# Altium PCB 主控板0415 .PcbDoc (part 1 of 3)
Units mil, origin at the board's own origin, x right, y up, seen from the top; angles counter-clockwise.
Board outline 9048 x 3931 mil, 2 copper layers (Top Layer, Bottom Layer); 421 components, 239 nets, 1182 pads, 360 vias.
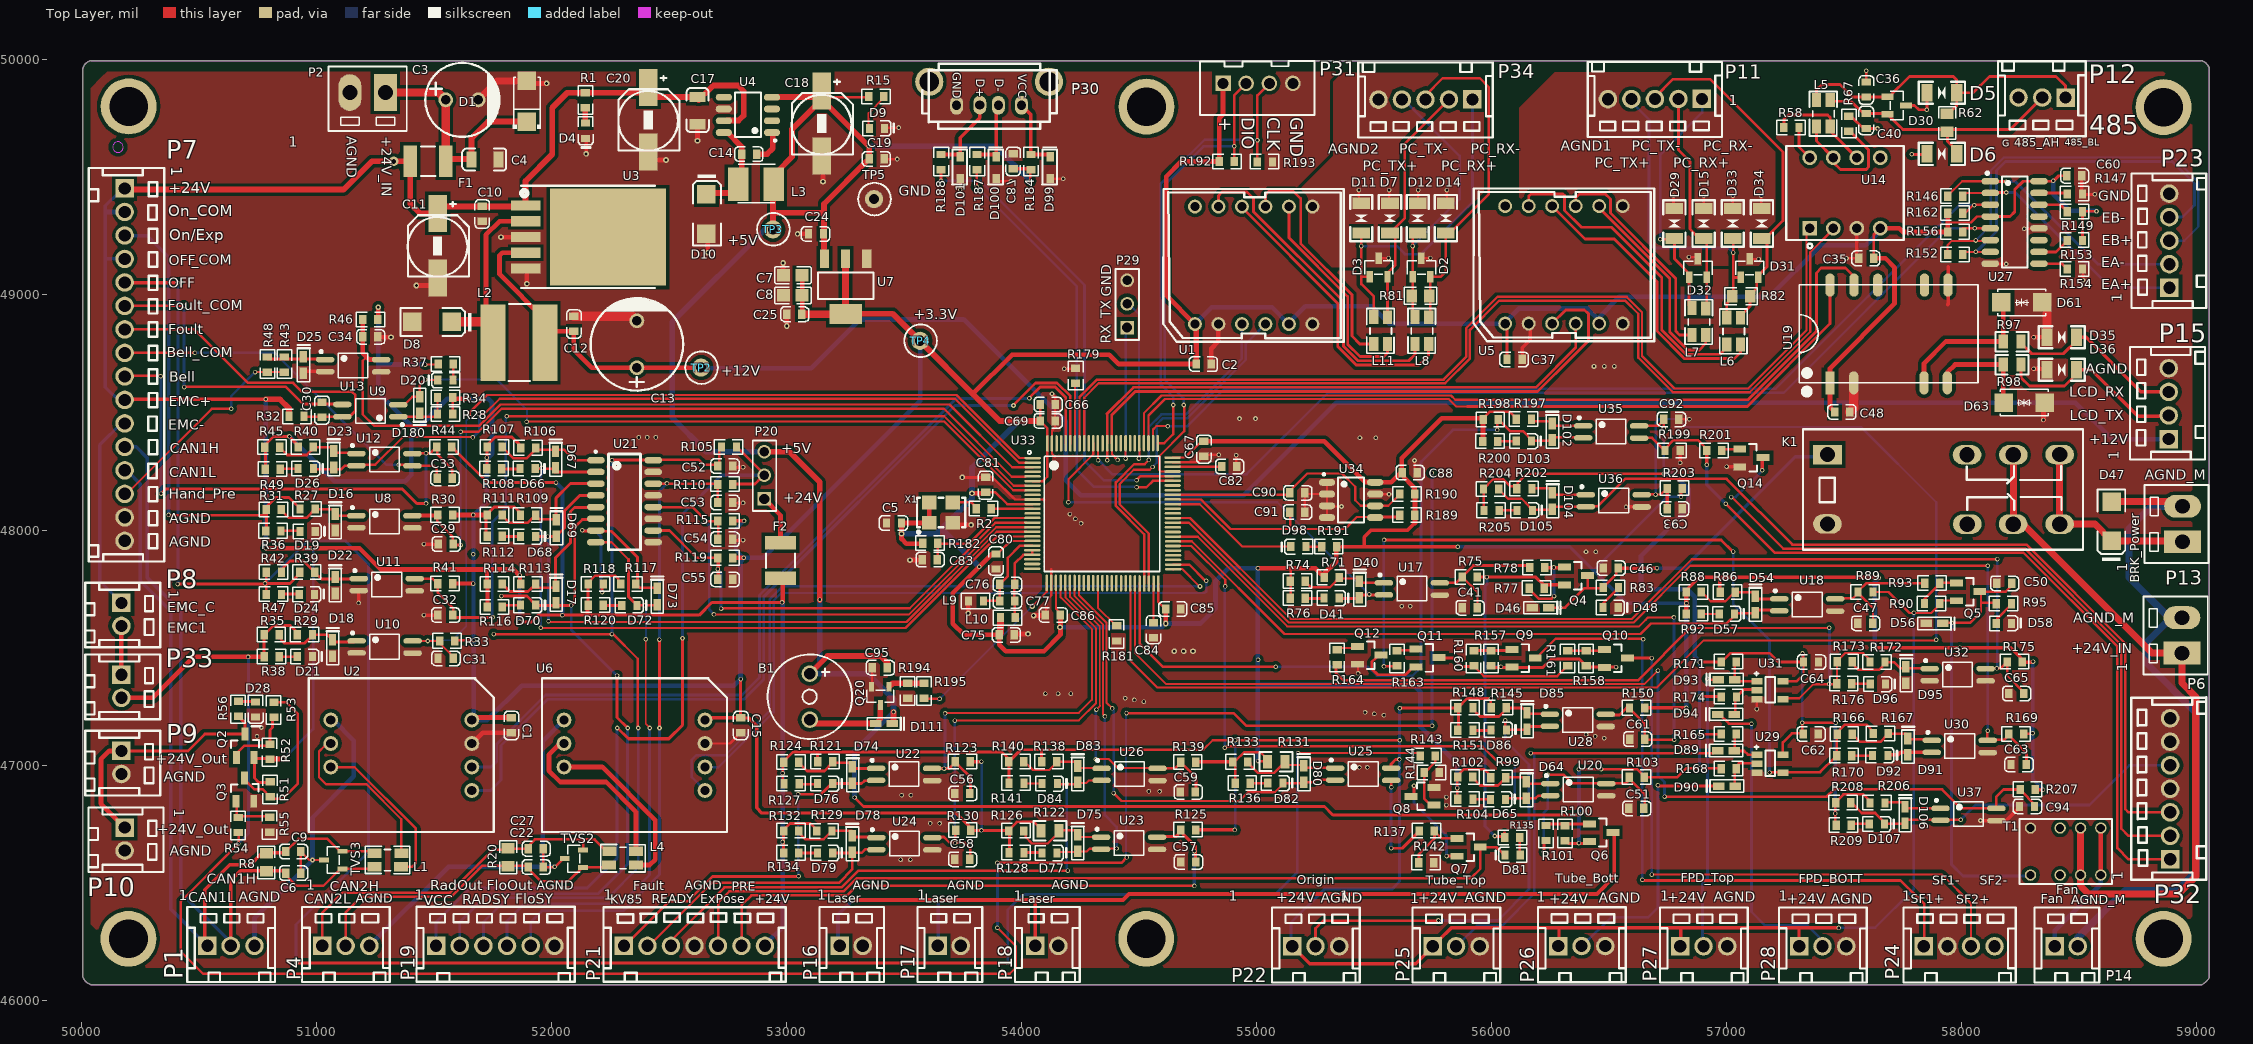
[diagram p0: Top Layer view]
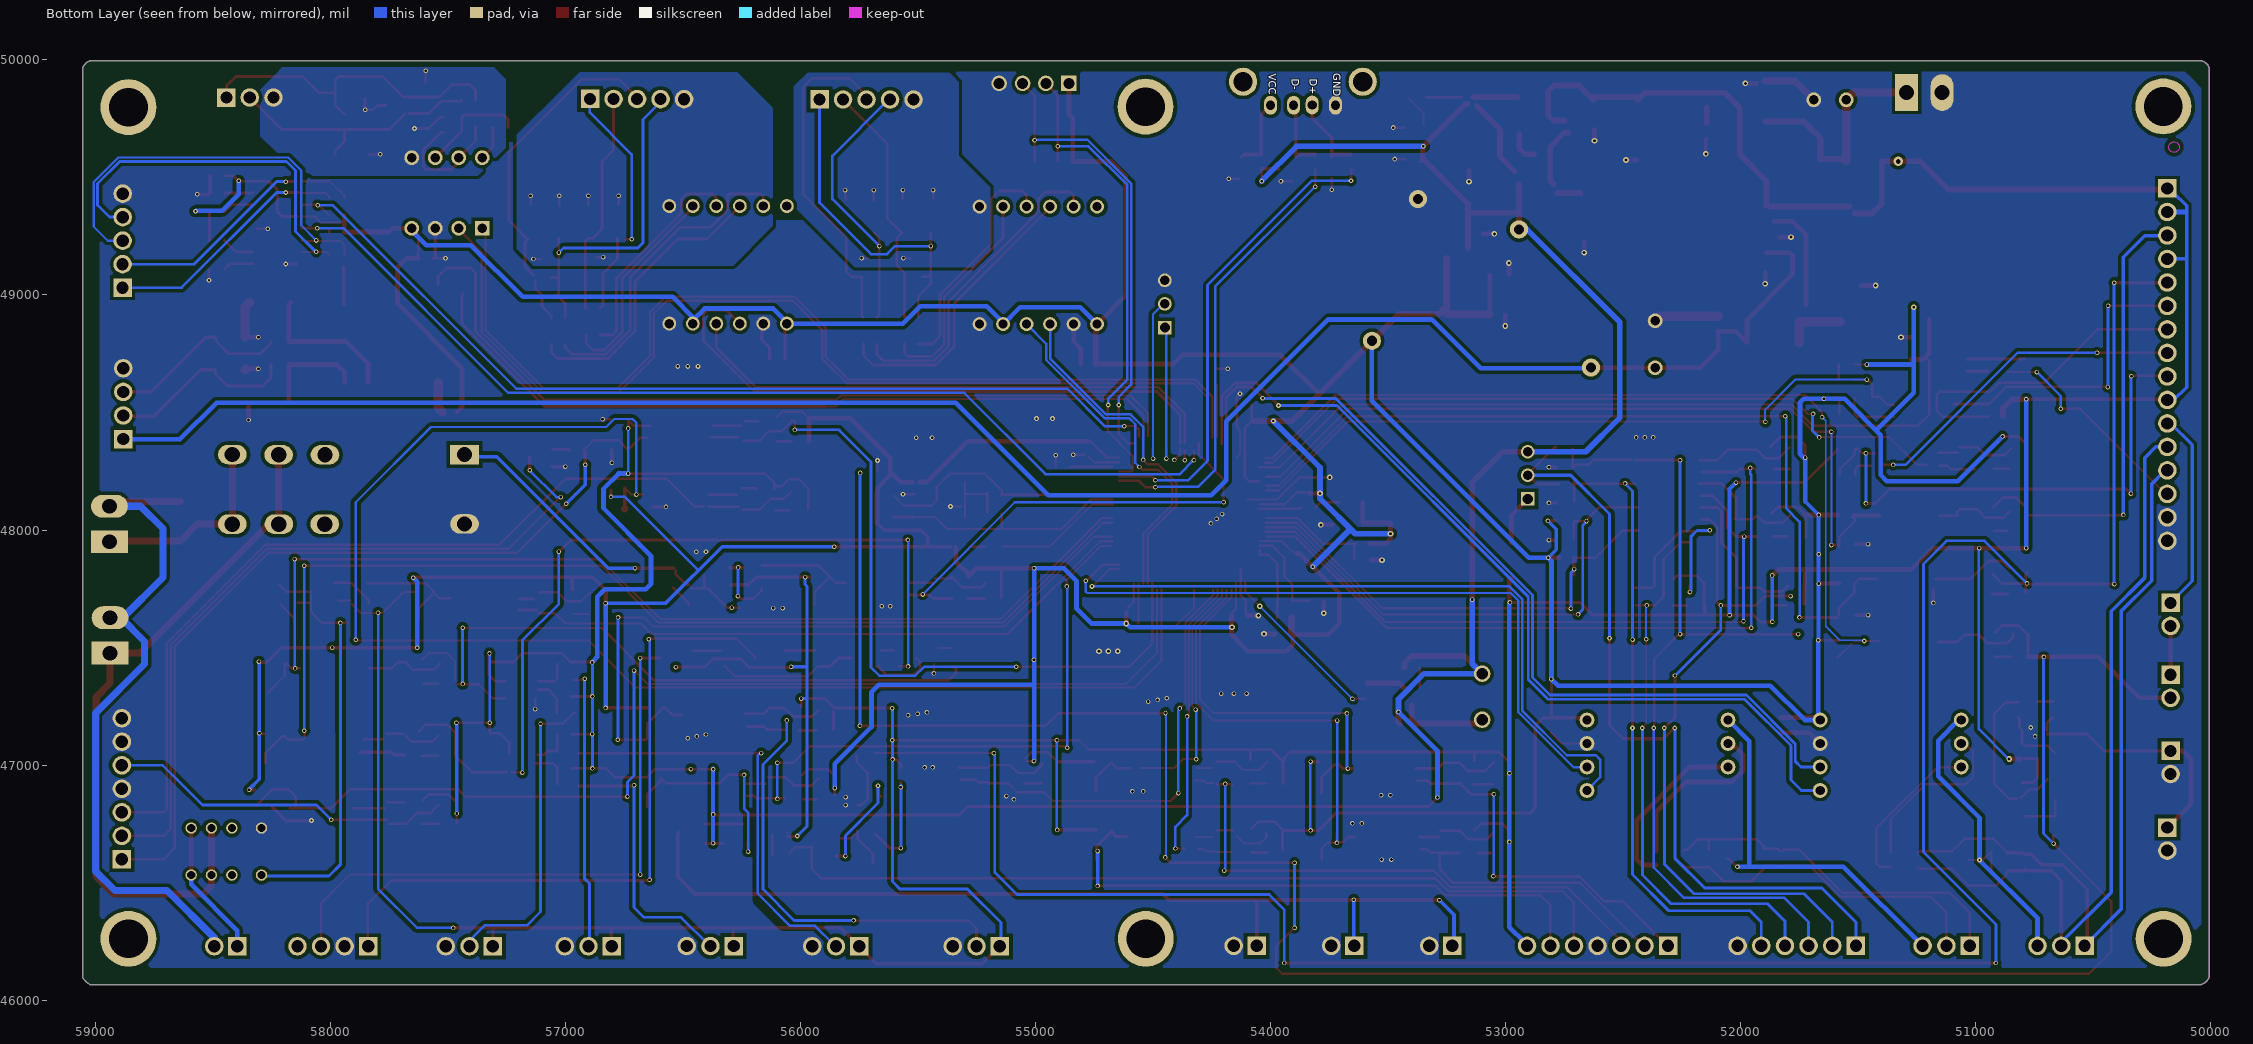
[diagram p1: Bottom Layer view, seen from below]

## Layer stack, top to bottom
Top Layer: signal copper 1.4
Dielectric: dielectric 12.6, FR-4, Dk 4.8
Bottom Layer: signal copper 1.4

## Board outline
50006,46099 50006,49960 cw(c50051.59,49952.23) 50040,49997 59020,49997 cw(c59006.72,49949.3) 59054,49964 59054,46097 cw(c58992.65,46128.31) 59022,46066 50041,46066 cw(c50058.69,46119.82)

## Design rules (kind name [scope] priority, off if disabled: settings)
Clearance Clearance_1 [inpoly] p1: gap=15
Clearance [All] p2: gap=6
MinimumSolderMaskSliver [All] p1: minsoldermaskwidth=0.5
PolygonConnect PolygonConnect_1 [All] p1: connectstyle=Direct reliefconductorwidth=10 reliefentries=4 polygonreliefangle="45 Angle"
PolygonConnect [InNet('No Net') vs InNet('GND')] p2: connectstyle=Direct reliefconductorwidth=10 reliefentries=4 polygonreliefangle="45 Angle"
RoutingVias [All] p1: holewidth=28 width=50 viastyle="Through Hole" minholewidth=28 minwidth=50 maxholewidth=28 maxwidth=50
SilkToSilkClearance [All] p1: silktosilkclearance=0
SilkscreenOverComponentPads SilkToSolderMaskClearance [IsPad] p1: minsilkscreentomaskgap=0
SolderMaskExpansion [All] p1: expansion=4
TestPointUsage FabricationTestPointUsage [All] p1: valid=0 allowmultiple=FALSE
Testpoint FabricationTestpoint [(IsPad And (OnTopLayer Or OnBottomLayer))] p1: side=3 testpointundercomponent=TRUE minsize=40 maxsize=100 preferedsize=60 minholesize=0 maxholesize=40 preferedholesize=32 testpointgrid=1 style=297 order=0123456789
Width [All] p1: maxlimit=190 minlimit=6 preferedwidth=10
21 further rules are at their usual default settings.

## Components (designator, comment, footprint, x,y, rotation, side; value= is the part's Value field where it differs from the comment)
B1 "" CPA5 53102,47392 r90 top
C1 "100NF" C0603 51830,47196 r90 top
C2 "100NF" C0603 54802,48706 r0 top
C3 "330uF" CAP-TH_BD8.0-P3.50-D0.5-FD 51620,49830 r0 top
C4 "100NF" C1206#1 51654,49572 r270 top
C5 "100NF" C0603 53484,48030 r0 top
C6 "30pF" C0603 50876,46540 r180 top
C7 "22uf/25v" C0805 53028,49084 r0 top
C8 "22uf/25v" C0805 53028,48998 r0 top
C9 "30pF" C0603 50876,46632 r180 top
C10 "100NF" C0603 51706,49372 r90 top
C11 "100UF/35V" CAP10 51510,49374 r270 top
C12 "1uf/25v" C0603 52096,48904 r90 top
C13 "1000uF" CAP-TH_BD10.0-P5.00-D1.0-FD 52364,48790 r90 top
C14 "0.1uF" C0603 52868,49599 r0 top
C15 "100NF" C0603 52806,47196 r90 top
C17 "100NF" C1206#2 52618,49848 r0 top
C18 "100uF/35V" CAP10 53144,49894 r270 top
C19 "100NF" C0603 53411,49579 r0 top
C20 "100uF/35V" CAP10 52406,49910 r270 top
C22 "30pF" C0603 51908,46566 r180 top
C24 "100NF" C0603 53152,49260 r0 top
C25 "1uf/25v" C0603 53008,48918 r180 top
C27 "30pF" C0603 51908,46644 r180 top
C29 "100NF" C0603 51525,47940 r180 top
C30 "100NF" C0603 51024,48538 r90 top
C31 "100NF" C0603 51524,47454 r180 top
C32 "100NF" C0603 51523,47638 r180 top
C33 "100NF" C0603 51520,48220 r180 top
C34 "100NF" C0603 51204,48822 r180 top
C35 "100NF" C0603 57620,49156 r0 top
C36 "100pF" C0603 57594,49900 r90 top
C37 "100NF" C0603 56124,48726 r0 top
C40 "100pF" C0603 57594,49714 r270 top
C41 "100NF" C0603 55881,47669 r180 top
C46 "100NF" C0603 56481,47838 r180 top
C47 "NC" C0603 57564,47603 r180 top
C48 "1uF" C0603 57518,48502 r0 top
C50 "100NF" C0603 58155,47773 r180 top
C51 "100NF" C0603 56590,46816 r180 top
C52 "100NF" C0603 52766.68,48272 r0 top
C53 "100NF" C0603 52766.68,48117 r0 top
C54 "100NF" C0603 52766.68,47961 r0 top
C55 "100NF" C0603 52766.68,47790 r0 top
C56 "100NF" C0603 53723,46879 r180 top
C57 "100NF" C0603 54683,46588 r180 top
C58 "100NF" C0603 53722,46599 r180 top
C59 "100NF" C0603 54682,46885 r180 top
C60 "100NF" C0603 58453,49507 r180 top
C61 "100NF" C0603 56594,47110 r180 top
C62 "100NF" C0603 57332,47132 r180 top
C63 "100NF" C0603 58216,47002 r180 top
C64 "100NF" C0603 57333,47438 r180 top
C65 "100NF" C0603 58206,47304 r180 top
C66 "10uF/16V" C0603 54086,48534 r180 top
C67 "100NF" C0603 54776,48372 r90 top
C69 "10uF/16V" C0603 54086,48464 r180 top
C75 "100NF" C0603 53964,47554 r0 top
C76 "1uF" C0603 53913,47769 r180 top
C77 "1uF" C0603 53913,47698 r180 top
C80 "100NF" C0603 53892,47840 r270 top
C81 "100NF" C0603 53848,48218 r90 top
C82 "2uF" C0603 54858,48270 r180 top
C83 "100NF" C0603 53584,47874 r180 top
C84 "2uF" C0603 54562,47548 r270 top
C85 "100NF" C0603 54672,47664 r0 top
C86 "100NF" C0603 54108,47638 r180 top
C87 "100NF" C0603 53965,49595.5 r90 top
C88 "100NF" C0603 55626,48244 r180 top
C90 "49pF" C0603 55148,48158 r180 top
C91 "49pF" C0603 55147,48076 r180 top
C92 "100NF" C0603 56738,48471 r180 top
C93 "100NF" C0603 56806,48090 r0 top
C94 "100NF" C0603 58252,46824 r180 top
C95 "100NF" C0603 53372,47414 r180 top
D1 "SS34" SMA_L4.3-W2.6-LS5.2-RD 51896,49824 r90 top
D2 "TPSM712" SOT-23-3_L2.9-W1.3-P1.90-LS2.4-BR 55702,49116 r270 top
D3 "TPSM712" SOT-23-3_L2.9-W1.3-P1.90-LS2.4-BR 55520,49116 r270 top
D4 "GREEN" LED0603#1 52146,49666 r270 top
D5 "SMB90XM" DIO-DT-SMD_L3.2-W1.6 57916,49860 r180 top
D6 "SMB90XM" DIO-DT-SMD_L3.2-W1.6 57916,49600 r180 top
D7 "SMB90XM" DIO-DT-SMD_L3.2-W1.6 55568,49326.99 r90 top
D8 "SS34" SMA#1 51574,48902 r180 top
D9 "GREEN" LED0603#1 53418,49709 r0 top
D10 "SS34" SMA#1 52644,49426 r270 top
D11 "SMB90XM" DIO-DT-SMD_L3.2-W1.6 55446,49326.99 r90 top
D12 "SMB90XM" DIO-DT-SMD_L3.2-W1.6 55686,49326.99 r90 top
D14 "SMB90XM" DIO-DT-SMD_L3.2-W1.6 55806,49326.99 r90 top
D15 "SMB90XM" DIO-DT-SMD_L3.2-W1.6 56902,49304 r90 top
D16 "1N4148WS" D123-1#1 51083,48065 r0 top
D17 "1N4148WS" D123-1#1 52023,47758 r0 top
D18 "1N4148WS" D123-1#1 51072,47530 r0 top
D19 "GREEN" LED0603#1 50996,47994 r0 top
D20 "GREEN" LED0603#2 51517,48638 r0 top
D21 "GREEN" LED0603#1 50984,47461 r0 top
D22 "1N4148WS" D123-1#1 51083,47797 r0 top
D23 "1N4148WS" D123-1#1 51077,48333 r0 top
D24 "GREEN" LED0603#1 50993,47726 r0 top
D25 "1N4148WS" D123-1#2 50948,48734 r180 top
D26 "GREEN" LED0603#1 50988,48261 r0 top
D28 "LED" LED0603#1 50742,47204 r270 top
D29 "SMB90XM" DIO-DT-SMD_L3.2-W1.6 56778,49304 r90 top
D30 "TPSM712" SOT-23-3_L2.9-W1.3-P1.90-LS2.4-BR 57724,49806 r180 top
D31 "TPSM712" SOT-23-3_L2.9-W1.3-P1.90-LS2.4-BR 57098,49114 r270 top
D32 "TPSM712" SOT-23-3_L2.9-W1.3-P1.90-LS2.4-BR 56878,49114 r270 top
D33 "SMB90XM" DIO-DT-SMD_L3.2-W1.6 57026,49304 r90 top
D34 "SMB90XM" DIO-DT-SMD_L3.2-W1.6 57150,49304 r90 top
D35 "SMB90XM" DIO-DT-SMD_L3.2-W1.6 58426,48820 r0 top
D36 "SMB90XM" DIO-DT-SMD_L3.2-W1.6 58426,48682 r0 top
D40 "M7" D123-1#1 55441,47779 r0 top
D41 "LED" LED0603#1 55352,47710 r0 top
D46 "M7" D123-1#1 56241,47667 r270 top
D47 "M7" SMA#2 58654,47956 r270 top
D48 "LED" LED0603#1 56539,47670 r0 top
D54 "M7" D123-1#1 57125,47715 r0 top
D56 "M7" D123-1#1 57916,47600 r270 top
D57 "LED" LED0603#1 57034,47643 r0 top
D58 "LED" LED0603#1 58212,47603 r0 top
D61 "SMAJ15CA" SMA_L4.3-W2.6-LS5.0-BI 58256,48968 r180 top
D63 "SMAJ15CA" SMA_L4.3-W2.6-LS5.0-BI 58266,48542 r180 top
D64 "M7" D123-1#1 56151,46926 r0 top
D65 "LED" LED0603#1 56060,46854 r0 top
D66 "GREEN" LED0603#1 51932,48261 r0 top
D67 "1N4148WS" D123-1#1 52021,48332 r0 top
D68 "GREEN" LED0603#1 51934,47972 r0 top
D69 "1N4148WS" D123-1#1 52024,48041 r0 top
D70 "GREEN" LED0603#1 51934,47680 r0 top
D72 "GREEN" LED0603#1 52365,47679 r0 top
D73 "1N4148WS" D123-1#1 52453,47749 r0 top
D74 "1N4148WS" D123-1#1 53284,46990 r0 top
D75 "1N4148WS" D123-1#1 54242,46700 r0 top
D76 "LED" LED0603#1 53197,46921 r0 top
D77 "GREEN" LED0603#1 54152,46626 r0 top
D78 "1N4148WS" D123-1#1 53283,46697 r0 top
D79 "LED" LED0603#1 53197,46626 r0 top
D80 "1N4148WS" D123-1#1 55204,46994 r0 top
D81 "LED" LED0603#1 56057,46618 r180 top
D82 "LED" LED0603#1 55113,46923 r0 top
D83 "1N4148WS" D123-1#1 54242,46993 r0 top
D84 "LED" LED0603#1 54153,46921 r0 top
D85 "1N4148WS" D123-1#1 56154,47220 r0 top
D86 "GREEN" LED0603#1 56063,47150 r0 top
D89 "M7" D123-1#1 56966,47064 r90 top
D90 "M7" D123-1#1 56969,46913 r90 top
D91 "M7" D123-1#1 57774,47110 r0 top
D92 "GREEN" LED0603#1 57686,47041 r0 top
D93 "M7" D123-1#1 56967,47366 r90 top
D94 "M7" D123-1#1 56966,47218 r90 top
D95 "M7" D123-1#1 57766,47415 r0 top
D96 "GREEN" LED0603#1 57676,47344 r0 top
D98 "GREEN" LED0603#1 55146,47929 r180 top
D99 "BV05C-MS" D123 54122,49588 r180 top
D100 "BV05C-MS" D123 53892.5,49588 r180 top
D101 "BV05C-MS" D123 53739.5,49588 r180 top
D102 "M7" D123-1#1 56261,48450 r0 top
D103 "LED" LED0603#1 56170,48378 r0 top
D104 "M7" D123-1#1 56262,48156 r0 top
D105 "LED" LED0603#1 56174,48084 r0 top
D106 "M7" D123-1#1 57762,46820 r0 top
D107 "LED" LED0603#1 57672,46749 r0 top
D111 "1N4148WS" D123-1#1 53448,47174 r270 top
D180 "1N4148WS" D123-1#2 51438,48500 r0 top
F1 "Fuse 2" D2120#1 51408,49542 r180 top
F2 "Fuse 2" D2120#2 52948,47938 r270 top
K1 "G2R-2-DC5" K1 57436,48312 r0 top locked
L1 "ACT45B-510-2P-TL003" L1206-6 51258,46572 r90 top
L2 "100UH" L-C54 51766,48782 r0 top
L3 "47UH" LC 52808,49462 r270 top
L4 "ACT45B-510-2P-TL003" L1206-6 52350,46628 r270 top
L5 "ACT45B-510-2P-TL003" L1206-6 57436,49726 r180 top
L6 "ACT45B-510-2P-TL003" L1206-6 57054,48800 r180 top
L7 "ACT45B-510-2P-TL003" L1206-6 56906,48840 r180 top
L8 "ACT45B-510-2P-TL003" L1206-6 55727.41,48802 r180 top
L9 "#NAME?" L0603 53780,47700 r90 top
L10 "#NAME?" L0603 53916,47628 r90 top
L11 "ACT45B-510-2P-TL003" L1206-6 55552,48802 r180 top
P1 "Header 3" 254-3P 50537,46231 r0 top locked
P2 "Header 2" JPP1 51294,49886 r180 top
P4 "Header 3" 254-3P 51026,46231 r0 top locked
P6 "Header 2" JPP1 58962,47476 r90 top locked
P7 "Header 16" 254-16P 50191,49435 r0 top locked
P8 "Header 2" 254-2P 50174,47684 r270 top
P9 "Header 2" 254-2P 50174,47054 r270 top
P10 "Header 2" 254-2P 50188,46728 r270 top locked
P11 "Header 5" 254-5P 56900,49836 r90 top locked
P12 "Header 3" 254-3P 58442,49840 r180 top
P13 "Header 2" JPP1 58965,47950 r90 top
P14 "Header 2" 254-2P 58402,46232 r0 top
P15 "Header 4" 254-4P 58897,48388 r90 top locked
P16 "Header 2" 254-2P 53233,46234 r0 top
P17 "Header 2" 254-2P 53650,46234 r0 top
P18 "Header 2" 254-2P 54065,46234 r0 top
P19 "Header 6" 254-6P 51515,46218 r0 top locked
P20 "Header 3" 2.54-3P 52916,48139 r180 top locked
P21 "Header 7" 254-7P 52322,46228 r0 top locked
P22 "Header 3" 254-3P 55152,46229 r0 top
P23 "Header 5" 254-5P 58886,49026 r0 top locked
P24 "Header 4H" 254-4P 57840,46213 r0 top
P25 "Header 3" 254-3P 55750,46229 r0 top
P26 "Header 3" 254-3P 56284,46230 r0 top
P27 "Header 3" 254-3P 56803,46229 r0 top
P28 "Header 3" 254-3P 57309,46229 r0 top
P29 "Header 3" 2.54-3P 54460,48868 r180 top
P30 "Header 4" USB-A 53720,49805 r0 top locked
P31 "Header 4" JP2 54848,49906 r180 top locked
P32 "Header 7" 254-7P 58890,46612 r90 top locked
P33 "Header 2" 254-2P 50174,47378 r270 top
P34 "Header 5" 254-5P 55924,49834 r90 top locked
Q2 "AO3401A" SOT32-5 50730,47041 r270 top
Q3 "Y1" SOT32-5 50729,46854 r270 top
Q4 "S8550" SOT32-5 56318,47772 r180 top
Q5 "S8550" SOT32-5 57986,47704 r180 top
Q6 "AO3401A" SOT32-5 56425,46680 r180 top
Q7 "Y1" SOT32-5 55861,46617 r180 top
Q8 "Y1" SOT32-5 55748,46900 r0 top
Q9 "S8550" SOT32-5 56095,47422 r180 top
Q10 "S8550" SOT32-5 56488,47421 r180 top
Q11 "Y1" SOT32-5 55686,47423 r180 top
Q12 "Y1" SOT32-5 55438,47434 r180 top
Q14 "Y1" SOT32-5 57064,48274 r180 top
Q20 "S8050" SOT-23-3_L2.9-W1.3-P1.90-LS2.3-BR 53400,47294 r90 top
R1 "30kΩ" R0603#1 52144,49796 r270 top
R2 "10R" R0603#1 53872,48090 r0 top
R8 "120Ω" R0805#1 50788,46586 r90 top
R15 "10kΩ" R0603#1 53415,49844 r0 top
R20 "120Ω" R0805#1 51816,46608 r270 top
R27 "10kΩ" R0603#1 50995,48089 r0 top
R28 "330Ω" R0603#2 51516,48494 r0 top
R29 "10kΩ" R0603#1 50984,47554 r0 top
R30 "5.1kΩ" R0603#1 51581,48064 r0 top
R31 "NC" R0603#1 50851,48087 r0 top
R32 "10kΩ" R0603#2 50884,48484 r0 top
R33 "5.1kΩ" R0603#1 51589,47528 r0 top
R34 "NC" R0603#2 51516,48564 r0 top
R35 "NC" R0603#1 50842,47554 r0 top
R36 "30kΩ" R0603#1 50850,47996 r0 top
R37 "5.1kΩ" R0603#2 51583,48706 r180 top
R38 "30kΩ" R0603#1 50843,47461 r0 top
R39 "10kΩ" R0603#1 50993,47820 r0 top
R40 "330Ω" R0603#1 50988,48353 r0 top
R41 "5.1kΩ" R0603#1 51581,47771 r0 top
R42 "NC" R0603#1 50852,47820 r0 top
R43 "10kΩ" R0603#2 50864,48672 r90 top
R44 "10kΩ" R0603#1 51577,48353 r0 top
R45 "NC" R0603#1 50845,48352 r0 top
R46 "5.1kΩ" R0603#2 51198,48896 r0 top
R47 "30kΩ" R0603#1 50852,47726 r0 top
R48 "NC" R0603#2 50792,48672 r90 top
R49 "5.1kΩ" R0603#1 50847,48259 r0 top
R51 "10kΩ" R0603#1 50804,46929 r90 top
R52 "10kΩ" R0603#1 50803,47088 r90 top
R53 "20kΩ" R0603#1 50820,47268 r90 top
R54 "10kΩ" R0603#1 50668,46777 r90 top
R55 "20kΩ" R0603#1 50802,46778 r90 top
R56 "30kΩ" R0603#1 50669,47271 r90 top
R58 "5.1kΩ" R0603#1 57308,49712 r0 top
R62 "120Ω" R0805#1 57938,49732 r270 top
R67 "5.1kΩ" R0603#1 57520,49696 r270 top
R71 "330Ω" R0603#1 55352,47798 r0 top
R74 "15P101R" R0603#1 55208,47782 r0 top
R75 "10kΩ" R0603#1 55940,47800 r0 top
R76 "5.1kΩ" R0603#1 55208,47710 r0 top
R77 "20kΩ" R0603#1 56224,47752 r0 top
R78 "20kΩ" R0603#1 56226,47840 r0 top
R81 "120Ω" R0805#1 55698,48996 r0 top
R82 "120Ω" R0805#1 57062,48994 r180 top
R83 "30kΩ" R0603#1 56540,47755 r0 top
R86 "330Ω" R0603#1 57037,47735 r0 top
R88 "NC" R0603#1 56893,47736 r0 top
R89 "10kΩ" R0603#1 57623,47736 r0 top
R90 "20kΩ" R0603#1 57906,47687 r0 top
R92 "5.1kΩ" R0603#1 56892,47643 r0 top
R93 "10kΩ" R0603#1 57907,47774 r0 top
R95 "30kΩ" R0603#1 58212,47686 r0 top
R97 "12Ω" R0805#2 58252,48802 r180 top
R98 "12Ω" R0805#2 58252,48704 r180 top
R99 "330Ω" R0603#1 56061,46946 r0 top
R100 "10kΩ" R0603#1 56313,46742 r90 top
R101 "10kΩ" R0603#1 56232,46743 r90 top
R102 "NC" R0603#1 55920,46949 r0 top
R103 "10kΩ" R0603#1 56650,46948 r0 top
R104 "5.1kΩ" R0603#1 55921,46855 r0 top
R105 "5.1kΩ" R0603#1 52788,48353 r0 top
R106 "330Ω" R0603#1 51934,48349 r0 top
R107 "NC" R0603#1 51791,48353 r0 top
R108 "5.1kΩ" R0603#1 51790,48261 r0 top
R109 "330Ω" R0603#1 51933,48063 r0 top
R110 "5.1kΩ" R0603#1 52772.68,48194 r0 top
R111 "NC" R0603#1 51792,48064 r0 top
R112 "5.1kΩ" R0603#1 51791,47973 r0 top
R113 "10kΩ" R0603#1 51934,47770 r0 top
R114 "NC" R0603#1 51791,47770 r0 top
R115 "5.1kΩ" R0603#1 52772.68,48038 r0 top
R116 "30kΩ" R0603#1 51791,47672 r0 top
R117 "10kΩ" R0603#1 52360,47770 r0 top
R118 "NC" R0603#1 52221,47770 r0 top
R119 "5.1kΩ" R0603#1 52772.68,47881 r0 top
R120 "30kΩ" R0603#1 52221,47680 r0 top
R121 "10kΩ" R0603#1 53197,47014 r0 top
R122 "330Ω" R0805#2 54084,46720 r0 top
R123 "5.1kΩ" R0603#1 53783,47014 r0 top
R124 "NC" R0603#1 53053,47012 r0 top
R125 "10kΩ" R0603#1 54742,46724 r0 top
R126 "NC" R0603#1 54010,46720 r0 top
R127 "30kΩ" R0603#1 53054,46921 r0 top
R128 "5.1kΩ" R0603#1 54011,46627 r0 top
R129 "10kΩ" R0603#1 53194,46719 r0 top
R130 "5.1kΩ" R0603#1 53784,46723 r0 top
R131 "330Ω" R0805#2 55046,47014 r0 top
R132 "NC" R0603#1 53053,46720 r0 top
R133 "NC" R0603#1 54963,47013 r0 top
R134 "30kΩ" R0603#1 53053,46626 r0 top
R135 "10kΩ" R0603#2 56056,46692 r0 top
R136 "5.1kΩ" R0603#1 54973,46923 r0 top
R137 "20kΩ" R0603#1 55757,46720 r0 top
R138 "10kΩ" R0603#1 54150,47014 r0 top
R139 "5.1kΩ" R0603#1 54741,47012 r0 top
R140 "NC" R0603#1 54010,47014 r0 top
R141 "30kΩ" R0603#1 54011,46923 r0 top
R142 "20kΩ" R0603#1 55755,46584 r0 top
R143 "20kΩ" R0603#1 55760,47039 r0 top
R144 "20kΩ" R0603#1 55778,46968 r0 top
R145 "10kΩ" R0603#1 56063,47244 r0 top
R146 "120Ω" R0603#1 58005,49420 r0 top
R147 "10kΩ" R0603#1 58514,49430 r0 top
R148 "NC" R0603#1 55921,47244 r0 top
R149 "10kΩ" R0603#1 58514,49354 r0 top
R150 "10kΩ" R0603#1 56651,47243 r0 top
R151 "20kΩ" R0603#1 55921,47148 r0 top
R152 "120Ω" R0603#1 58005,49172 r0 top
R153 "10kΩ" R0603#1 58514,49232 r0 top
R154 "10kΩ" R0603#1 58514,49110 r0 top
R156 "10kΩ" R0603#1 58005,49268 r0 top
R157 "20kΩ" R0603#1 55998,47487 r90 top
R158 "20kΩ" R0603#1 56403,47487 r90 top
R160 "20kΩ" R0603#1 55925,47486 r90 top
R161 "20kΩ" R0603#1 56324,47487 r90 top
R162 "10kΩ" R0603#1 58005,49348 r0 top
R163 "20kΩ" R0603#1 55598,47487 r90 top
R164 "20kΩ" R0603#1 55344,47491 r90 top
R165 "20kΩ" R0603#1 57041,47132 r0 top
R166 "510Ω" R0603#1 57534,47131 r0 top
R167 "NC" R0603#1 57688,47134 r0 top
R168 "20kΩ" R0603#1 57041,46984 r0 top
R169 "10kΩ" R0603#1 58264,47132 r0 top
R170 "5.1kΩ" R0603#1 57533,47040 r0 top
R171 "20kΩ" R0603#1 57041,47439 r0 top
R172 "510Ω" R0603#1 57674,47438 r0 top
R173 "NC" R0603#1 57534,47440 r0 top
R174 "20kΩ" R0603#1 57042,47290 r0 top
R175 "10kΩ" R0603#1 58258,47439 r0 top
R176 "5.1kΩ" R0603#1 57532,47346 r0 top
R179 "10kΩ" R0603#1 54230,48624 r270 top
R181 "10kΩ" R0603#1 54406,47592 r90 top
R182 "10kΩ" R0603#1 53644,47944 r0 top
R184 "0Ω" R0603#2 54040.5,49533.5 r90 top
R187 "220Ω" R0603#2 53811,49533.5 r90 top
R188 "220Ω" R0603#2 53658,49533.5 r90 top
R189 "10kΩ" R0603#1 55674,48063 r0 top
R190 "10kΩ" R0603#1 55674,48153 r0 top
R191 "5.1kΩ" R0603#1 55341,47929 r0 top
R192 "10kΩ" R0603#2 54842,49568 r0 top
R193 "10kΩ" R0603#2 55068,49566 r180 top
R194 "10kΩ" R0603#1 53516,47348 r90 top
R195 "1.8kΩ" R0603#1 53586,47348 r90 top
R197 "330Ω" R0603#1 56170,48471 r0 top
R198 "10kΩ" R0603#1 56028,48470 r0 top
R199 "5.1kΩ" R0603#1 56802,48338 r0 top
R200 "5.1kΩ" R0603#1 56027,48377 r0 top
R201 "5.1kΩ" R0603#1 56980,48338 r0 top
R202 "510Ω" R0603#1 56172,48176 r0 top
R203 "5.1kΩ" R0603#1 56811,48177 r0 top
R204 "NC" R0603#1 56030,48174 r0 top
R205 "5.1kΩ" R0603#1 56032,48083 r0 top
R206 "510Ω" R0603#1 57674,46839 r0 top
R207 "5.1kΩ" R0603#1 58313,46896 r0 top
R208 "NC" R0603#1 57529,46840 r0 top
R209 "5.1k" R0603#1 57530,46744 r0 top
T1 "HFD4/24" JP1 58282,46732 r0 top locked
TP2 "RH-5001" TP 52640,48692 r0 top
TP3 "RH-5001" TP 52946,49280 r0 top
TP4 "RH-5001" TP 53572,48806 r0 top
TP5 "RH-5001" TP 53376,49409 r0 top
TVS2 "PESD1CAN" SOT-23-3_L2.9-W1.3-P1.90-LS2.3-BR 52096,46602 r0 top
TVS3 "PESD1CAN" SOT-23-3_L2.9-W1.3-P1.90-LS2.3-BR 51072,46596 r0 top
U1 "RSM3422" DIP-12_L19.5-W16.5-P2.54-LS12.7-BL 54988,49126 r0 top locked
U2 "CTM1051KAT" COMM-TH_CTM1051KAT 51362,47042 r180 top locked
U3 "LM2576HVR-12" TO5 51874,49390 r0 top
U4 "LM2674MX-5.0/NOPB" SOP-8 52943,49694 r180 top
U5 "RSM3422" DIP-12_L19.5-W16.5-P2.54-LS12.7-BL 56308,49128 r0 top locked
U6 "CTM1051KAT" COMM-TH_CTM1051KAT 52354,47042 r180 top
U7 "TLV1117LV33DCYR" TO9 53259,48918 r0 top
U8 "LTV-217-C-G" SOP-4#1 51174,48063 r0 top
U9 "LTV-217-C-G" SOP-4#2 51346,48480 r0 top
U10 "LTV-217-C-G" SOP-4#1 51175,47530 r0 top
U11 "LTV-217-C-G" SOP-4#1 51184,47795 r0 top
U12 "LTV-217-C-G" SOP-4#1 51174,48327 r0 top
U13 "LTV-217-C-G" SOP-4#2 51041,48727 r180 top
U14 "TD301M485" COMM-TH_TD301M485 57504,49434 r0 top
U17 "LTV-217-C-G" SOP-4#1 55545,47777 r0 top
U18 "LTV-217-C-G" SOP-4#1 57227,47709 r0 top
U19 "TD331S232H" U1 57436,48608 r0 top locked
U20 "LTV-217-C-G" SOP-4#1 56253,46923 r0 top
U21 "LTV-247" SOP16-1 52186,48298 r0 top
U22 "LTV-217-C-G" SOP-4#1 53385,46988 r0 top
U23 "LTV-217-C-G" SOP-4#1 54342,46695 r0 top
U24 "LTV-217-C-G" SOP-4#1 53386,46693 r0 top
U25 "LTV-217-C-G" SOP-4#1 55338,46989 r0 top
U26 "LTV-217-C-G" SOP-4#1 54344,46988 r0 top
U27 "AM26LV32IDR" SOP16 58122,49484 r0 top locked
U28 "LTV-217-C-G" SOP-4#1 56251,47218 r0 top
U29 "SN74AHC1G02DBVR" SOT32-6 57122,47036 r0 top
U30 "LTV-217-C-G" SOP-4#1 57876,47107 r0 top
U31 "SN74AHC1G02DBVR" SOT32-6 57122,47349 r0 top
U32 "LTV-217-C-G" SOP-4#1 57867,47412 r0 top
U33 "STM32F407VET6" 100PIN 54053,48304 r45 top locked
U34 "AT24C64D-SSHM-T" SOP-8 55296,48200 r0 top
U35 "LTV-217-C-G" SOP-4#1 56393,48445 r0 top
U36 "LTV-217-C-G" SOP-4#1 56404,48152 r0 top locked
U37 "LTV-217-C-G" SOP-4#1 57913,46818 r0 top
X1 "8MHz" OSC-SMD_4P-L5.0-W3.2-BL_SG5032 53658,48074 r0 top

## Footprints (in the part's own frame and the unit in brackets; to place one, negate y for a bottom-side part, rotate by r counter-clockwise, add the part's x,y. Pads: shape width x height; smd on the part's side, far side on the other; paste and mask are expansions set on the pad)
2.54-3P [mil]
  rect 57.37x57.37 hole 43: 1(10,7)
  round 58.37 hole 41: 2(10,-94) 3(10,-194)
  silkscreen extent -41,-242 59,59
100PIN [mil]
  oval 69.87x10.81 smd rot 135: 1(-2,5) 2(-15.92,-8.79) 3(-29.83,-22.58) 4(-43.75,-36.37) 5(-57.67,-50.17) 6(-71.58,-63.96) 7(-85.5,-77.75) 8(-99.42,-91.54) 9(-113.33,-105.33) 10(-127.25,-119.12) 11(-141.17,-132.92) 12(-155.08,-146.71) 13(-169,-160.5) 14(-182.92,-174.29) 15(-196.83,-188.08) 16(-210.75,-201.87) 17(-224.67,-215.67) 18(-238.58,-229.46) 19(-252.5,-243.25) 20(-266.42,-257.04) 21(-280.33,-270.83) 22(-294.25,-284.62) 23(-308.17,-298.42) 24(-322.08,-312.21) 25(-336,-326) 51(86,-752) 52(99.92,-737.92) 53(113.83,-723.83) 54(127.75,-709.75) 55(141.67,-695.67) 56(155.58,-681.58) 57(169.5,-667.5) 58(183.42,-653.42) 59(197.33,-639.33) 60(211.25,-625.25) 61(225.17,-611.17) 62(239.08,-597.08) 63(253,-583) 64(266.92,-568.92) 65(280.83,-554.83) 66(294.75,-540.75) 67(308.67,-526.67) 68(322.58,-512.58) 69(336.5,-498.5) 70(350.42,-484.42) 71(364.33,-470.33) 72(378.25,-456.25) 73(392.17,-442.17) 74(406.08,-428.08) 75(420,-414)
  oval 69.87x10.81 smd rot 45: 26(-335,-412) 27(-321.13,-426.08) 28(-307.25,-440.17) 29(-293.38,-454.25) 30(-279.5,-468.33) 31(-265.63,-482.42) 32(-251.75,-496.5) 33(-237.88,-510.58) 34(-224,-524.67) 35(-210.13,-538.75) 36(-196.25,-552.83) 37(-182.38,-566.92) 38(-168.5,-581) 39(-154.63,-595.08) 40(-140.75,-609.17) 41(-126.88,-623.25) 42(-113,-637.33) 43(-99.13,-651.42) 44(-85.25,-665.5) 45(-71.38,-679.58) 46(-57.5,-693.67) 47(-43.63,-707.75) 48(-29.75,-721.83) 49(-15.88,-735.92) 50(-2,-750) 76(419,-326) 77(405.12,-312.21) 78(391.25,-298.42) 79(377.37,-284.62) 80(363.5,-270.83) 81(349.62,-257.04) 82(335.75,-243.25) 83(321.87,-229.46) 84(308,-215.67) 85(294.13,-201.88) 86(280.25,-188.08) 87(266.37,-174.29) 88(252.5,-160.5) 89(238.62,-146.71) 90(224.75,-132.92) 91(210.87,-119.13) 92(197,-105.33) 93(183.12,-91.54) 94(169.25,-77.75) 95(155.37,-63.96) 96(141.5,-50.17) 97(127.62,-36.37) 98(113.75,-22.58) 99(99.87,-8.79) 100(86,5)
  silkscreen extent -309,-719 386,39
254-2P [mil]
  rect 78.74x78.74 hole 52: 1(-6,-3)
  round 78.74 hole 52: 2(92,-3)
  silkscreen extent -92,-157 183,162
254-3P [mm]
  rect 2x2 hole 1.321: 1(0,0)
  round 2 hole 1.321: 2(2.515,0) 3(5.08,0)
  silkscreen extent -2.18,-3.91 7.29,4.19
254-4P [mil]
  rect 78.74x78.74 hole 52: 1(-1,16)
  round 78.74 hole 52: 2(99.33,16) 3(199.67,16) 4(300,16)
  silkscreen extent -88,-138 390,181
254-5P [mil]
  rect 78.74x78.74 hole 52: 1(-2,5)
  round 78.74 hole 52: 2(-2.25,105) 3(-2.5,205) 4(-2.75,305) 5(-3,405)
  silkscreen extent -164,-81 155,491
254-6P [mil]
  rect 78.74x78.74 hole 52: 1(-5,13)
  round 78.74 hole 52: 2(95.6,13) 3(196.2,13) 4(296.8,13) 5(397.4,13) 6(498,13)
  silkscreen extent -89,-140 585,179
254-7P [mil]
  rect 78.74x78.74 hole 52: 1(-13,3)
  round 78.74 hole 52: 2(87,3) 3(187,3) 4(287,3) 5(387,3) 6(487,3) 7(587,3)
  silkscreen extent -100,-150 676,168
254-16P [mil]
  rect 78.74x78.74 hole 52: 1(-6,18)
  round 78.74 hole 52: 2(-6,-81.93) 3(-6,-181.87) 4(-6,-281.8) 5(-6,-381.73) 6(-6,-481.67) 7(-6,-581.6) 8(-6,-681.53) 9(-6,-781.47) 10(-6,-881.4) 11(-6,-981.33) 12(-6,-1081.27) 13(-6,-1181.2) 14(-6,-1281.13) 15(-6,-1381.07) 16(-6,-1481)
  silkscreen extent -158,-1569 163,105
C0603 [mm]
  rect 0.8x1 smd: 1(0.152,0) 2(-1.473,0)
  silkscreen extent -2.24,-0.79 0.81,0.79
C0805 [mm]
  rect 1.41x1.35 smd: 1(-1,0) 2(1,0)
  silkscreen extent -1.96,-0.9 1.96,0.9
C1206#1 [mil]
  rect 68.9x43.31 smd: 1(-4,6) 2(-4,122)
  silkscreen extent -52,-33 43,154
C1206#2 [mil]
  rect 68.9x43.31 smd: 1(4,-6) 2(4,-122)
  silkscreen extent -43,-154 52,33
CAP10 [mil]
  rect 157.48x78.74 smd: 1(27,7) 2(302,7)
  silkscreen extent -22,-121 296,140
CAP-TH_BD8.0-P3.50-D0.5-FD [mm]
  round 1.6 hole 1: 1(-1.75,0) 2(1.75,0)
  silkscreen extent -3.96,-4 4.04,4
CAP-TH_BD10.0-P5.00-D1.0-FD [mm]
  round 1.6 hole 1: 1(-2.54,0) 2(2.54,0)
  silkscreen extent -5,-5 5.08,5
COMM-TH_CTM1051KAT [mm]
  round 1.6 hole 1: 1(-7.62,-3.81) 2(-7.62,-1.27) 3(-7.62,1.27) 4(-7.62,3.81) 6(7.62,1.27) 7(7.62,-1.27) 8(7.62,-3.81)
  silkscreen extent -10,-8.3 10,8.3
COMM-TH_TD301M485 [mm]
  rect 1.6x1.6 hole 1: 1(-3.81,-3.81)
  round 1.6 hole 1: 2(-1.27,-3.81) 3(1.27,-3.81) 4(3.81,-3.81) 5(3.81,3.81) 6(1.27,3.81) 7(-1.27,3.81) 8(-3.81,3.81)
  silkscreen extent -6.35,-5.97 6.35,5.08
CPA5 [mil]
  round 70.37 hole 49: 1(-199,2) 2(-3,2)
  silkscreen extent -281,-178 79,182
D123 [mm]
  rect 0.8x1 smd: 1(0,0) 2(0,2.362)
  silkscreen extent -0.74,-1.02 0.86,3
D123-1#1 [mil]
  rect 31.5x49.21 smd: 1(-3,3) 2(-3,-67)
  silkscreen extent -28,-103 24,53
D123-1#2 [mil]
  rect 31.5x49.21 smd: 1(3,-3) 2(3,67)
  silkscreen extent -24,-53 28,103
D2120#1 [mil]
  rect 59.06x133.86 smd: 1(8,-27) 2(-143,-27)
  silkscreen extent -99,-89 -37,35
D2120#2 [mil]
  rect 59.06x133.86 smd: 1(-8,27) 2(143,27)
  silkscreen extent 37,-35 99,89
DIO-DT-SMD_L3.2-W1.6 [mm]
  rect 1.2x1.9 smd: 1(-1.6,0) 2(1.6,0)
  silkscreen extent -2.5,-1.2 2.5,1.2
DIP-12_L19.5-W16.5-P2.54-LS12.7-BL [mm]
  round 1.5 hole 1: 1(-6.35,-6.35) 2(-3.81,-6.35) 3(-1.27,-6.35) 4(1.27,-6.35) 5(3.81,-6.35) 6(6.35,-6.35) 7(6.35,6.35) 8(3.81,6.35) 9(1.27,6.35) 10(-1.27,6.35) 11(-3.81,6.35) 12(-6.35,6.35)
  silkscreen extent -9.77,-8.25 9.75,8.25
JP1 [mil]
  round 48.37 hole 35: 1(11,0) 2(137,0) 3(224,0) 4(310,0) 5(310,-200) 6(224,-200) 7(137,-200) 8(11,-200)
  silkscreen extent -36,-237 358,38
JP2 [mil]
  rect 66.37x66.37 hole 47: 1(-10,6)
  round 66.37 hole 47: 2(-108,6) 3(-207,6) 4(-307,6)
  silkscreen extent -398,-90 88,140
JPP1 [mil]
  rect 97.43x156.48 hole 63: 1(0,25)
  oval 97.43x156.48 hole 63: 2(151,25)
  silkscreen extent -91,-85 241,188
K1 [mil]
  rect 122.05x82.68 hole 65: 1(-7,9)
  oval 122.05x82.68 hole 65: 2(587,8) 3(784,8) 4(981,9) 5(981,-287) 6(783,-287) 7(588,-287) 8(-7,-286)
  silkscreen extent -111,-396 1080,117
L0603 [mil]
  rect 38.37x30.5 smd: 1(-1,5) 2(-1,-58)
  silkscreen extent -34,-85 30,35
L1206-6 [mil]
  rect 39.37x59.06 smd: 1(-5,10) 2(53,10) 3(53,-104) 4(-5,-103)
  silkscreen extent -34,-140 83,50
L-C54 [mil]
  rect 106.3x326.77 smd: 1(-15,15) 2(207,15)
  silkscreen extent 53,-148 144,179
LC [mil]
  rect 141.73x86.61 smd: 1(-9,-13) 2(-9,138)
  silkscreen extent -94,-14 70,144
LED0603#1 [mil]
  rect 30.5x38.37 smd: 1(-65,0) 2(0,0)
  silkscreen extent -93,-32 39,32
LED0603#2 [mil]
  rect 30.5x38.37 smd: 1(65,0) 2(0,0)
  silkscreen extent -39,-32 93,32
OSC-SMD_4P-L5.0-W3.2-BL_SG5032 [mm]
  rect 1.6x1.5 smd: 1(-1.27,-1.1) 2(1.27,-1.1) 3(1.27,1.1) 4(-1.27,1.1)
  silkscreen extent -2.6,-2.25 2.6,1.6
R0603#1 [mm]
  rect 0.8x1 smd: 1(0,0) 2(-1.626,0)
  silkscreen extent -2.39,-0.76 0.69,0.81
R0603#2 [mm]
  rect 0.8x1 smd: 1(0,0) 2(1.626,0)
  silkscreen extent -0.69,-0.81 2.39,0.76
R0805#1 [mil]
  rect 44.59x54.21 smd: 1(-38.04,0) 2(38.04,0)
  silkscreen extent -69,-36 69,36
R0805#2 [mil]
  rect 38.43x58.12 smd: 1(0,0) 2(75,0)
  silkscreen extent -33,-41 107,42
SMA#1 [mil]
  rect 78.74x78.74 smd: 1(-2,16) 2(165,16)
  silkscreen extent -87,-42 216,77
SMA#2 [mil]
  rect 78.74x78.74 smd: 1(2,-16) 2(-165,-16)
  silkscreen extent -216,-77 87,42
SMA_L4.3-W2.6-LS5.0-BI [mm]
  rect 2x2 smd: 1(-2.2,0) 2(2.2,0)
  silkscreen extent -2.6,-1.43 2.6,1.43
SMA_L4.3-W2.6-LS5.2-RD [mm]
  rect 2x2 smd: 1(-2.2,0) 2(2.2,0)
  silkscreen extent -2.98,-1.5 2.6,1.5
SOP16 [mm]
  oval 1.9x0.7 smd: 1(0,0) 2(0,-1.274) 3(0,-2.547) 4(0,-3.821) 5(0,-5.095) 6(0,-6.368) 7(0,-7.642) 8(0,-8.915) 9(5.258,-8.915) 10(5.258,-7.642) 11(5.258,-6.368) 12(5.258,-5.095) 13(5.258,-3.821) 14(5.258,-2.547) 15(5.258,-1.274) 16(5.258,0)
  silkscreen extent -0.47,-9.35 4.04,1.01
SOP16-1 [mm]
  oval 1.9x0.7 smd: 1(0.102,-0.025) 2(0.098,-1.292) 3(0.094,-2.558) 4(0.091,-3.825) 5(0.087,-5.091) 6(0.083,-6.357) 7(0.08,-7.624) 8(0.076,-8.89) 9(6.274,-8.89) 10(6.277,-7.624) 11(6.281,-6.357) 12(6.285,-5.091) 13(6.288,-3.825) 14(6.292,-2.558) 15(6.296,-1.292) 16(6.299,-0.025)
  silkscreen extent -0.03,-9.73 4.9,1
SOP-4#1 [mil]
  oval 78.74x23.62 smd: 1(-3,-2) 2(-3,-53) 3(235,-54) 4(235,-2)
  silkscreen extent -26,-80 179,38
SOP-4#2 [mil]
  oval 78.74x23.62 smd: 1(3,2) 2(3,53) 3(-235,54) 4(-235,2)
  silkscreen extent -179,-38 26,80
SOP-8 [mil]
  oval 68.9x29.53 smd: 1(4,3) 2(4,-47) 3(4,-97) 4(4,-147) 5(209,-147) 6(209,-97) 7(209,-47) 8(209,3)
  silkscreen extent -14,-168 161,42
SOT32-5 [mil]
  rect 55.12x29.53 smd: 1(8,-70) 2(8,5) 3(-91,-34)
  silkscreen extent -65,-92 -32,26
SOT32-6 [mil]
  rect 47.24x27.56 smd: 1(7,8) 2(7,-30) 3(7,-68) 4(118,-68) 5(118,8)
  silkscreen extent -4,-83 84,48
SOT-23-3_L2.9-W1.3-P1.90-LS2.3-BR [mm]
  rect 1.07x0.532 smd: 1(0.99,-0.95) 2(0.99,0.95) 3(-0.99,0)
  silkscreen extent -0.66,-1.45 0.64,1.45
SOT-23-3_L2.9-W1.3-P1.90-LS2.4-BR [mm]
  rect 1.25x0.7 smd: 1(1,-0.95) 2(1,0.95) 3(-1,0)
  silkscreen extent -0.73,-1.53 0.73,1.53
TO5 [mm]
  rect 12.5x10.5 smd: 0(9.322,-3.658)
  rect 3.15x1.1 smd: 1(0.432,-0.254) 2(0.432,-1.949) 3(0.432,-3.645) 4(0.432,-5.34) 5(0.432,-7.036)
  silkscreen extent -0.05,-9.17 14.4,1.91
TO9 [mil]
  rect 39.37x78.74 smd: 1(83,237) 2(-7,237) 3(-97,237)
  rect 137.8x86.61 smd: 4(-7,1)
  silkscreen extent -125,65 111,177
TP [mil]
  round 77.37 hole 43: 1(-3,-1)
  silkscreen extent -70,-70 68,68
U1 [mil]
  rect 39.37x98.43 smd: 1(4,18)
  oval 39.37x98.43 smd: 2(105,18) 3(404,18) 4(503,18) 5(506,434) 6(406,434) 7(207,434) 8(106,434) 9(4,434)
  silkscreen extent -127,-32 634,435
USB-A [mil]
  round 119.74 hole 82: 0(-112,102) 0(397,102)
  oval 55.12x79.74 hole 39: 1(4,2) 2(103,3) 3(182,2) 4(280,2)
  silkscreen extent -141,-98 430,179

## Part data
B1: library part Bell, "Electrical Bell"
C1 C2 C4 C5 C6 C9 C10 C12 C14 C15 C17 C19 C22 C24 C25 C27 C29 C30 C31 C32 C33 C34 C35 C36 C37 C40 C41 C46 C47 C48 C50 C51 C52 C53 C54 C55 C56 C57 C58 C59 C60 C61 C62 C63 C64 C65 C66 C67 C69 C75 C76 C77 C80 C81 C82 C83 C84 C85 C86 C87 C88 C90 C91 C92 C93 C94 C95: library part CAP, "贴片电容 10uF/X5R/20%/6.3V"
C7 C8: library part CAP
C11 C13 C18 C20: library part "Cap Pol1", "Polarized Capacitor (Radial)"
D1 D2 D3 D8 D9 D10 D16 D17 D18 D19 D20 D21 D22 D23 D24 D25 D26 D28 D31 D40 D41 D46 D47 D48 D54 D56 D57 D58 D64 D65 D66 D67 D68 D69 D70 D72 D73 D74 D75 D76 D77 D78 D79 D80 D81 D82 D83 D84 D85 D86 D89 D90 D91 D92 D93 D94 D95 D96 D98 D99 D100 D101 D102 D103 D104 D105 D106 D107 D111 D180: library part D_TH_FR104
D4: library part NCD0603R1_C84263
D29: library part SMD4532-075NF
D30 D32 D61: library part BV15C_1
F1 F2: "Fuse"
L2 L3 L8: library part Inductor, "Inductor"
L9 L10: library part BPH853025R5-101T, "标称阻抗@测试频率:100Ω@100MHz;误差:±25%;直流电阻(RDC):1mΩ;"
P1 P4 P12 P20 P22 P25 P26 P27 P28 P29: "Header, 3-Pin"
P2 P6 P8 P9 P10 P13 P14 P16 P17 P18 P33: "Header, 2-Pin"
P7: "Header, 16-Pin"
P11 P23 P34: "Header, 5-Pin"
P15 P30 P31: "Header, 4-Pin"
P19: "Header, 6-Pin"
P21 P32: "Header, 7-Pin"
P24: "Header, 4-Pin, Right Angle"
Q2 Q3 Q4 Q5 Q6 Q7 Q8 Q9 Q10 Q11 Q12 Q14: library part MMBT8050C(1.5A)
Q20: library part S8050_C20069125
R1 R2 R8 R15 R20 R27 R28 R29 R30 R31 R32 R33 R34 R35 R36 R37 R38 R39 R40 R41 R42 R43 R44 R45 R46 R47 R48 R49 R51 R52 R53 R54 R55 R56 R58 R62 R67 R71 R74 R75 R76 R77 R78 R81 R82 R83 R86 R88 R89 R90 R92 R93 R95 R97 R98 R99 R100 R101 R102 R103 R104 R105 R106 R107 R108 R109 R110 R111 R112 R113 R114 R115 R116 R117 R118 R119 R120 R121 R122 R123 R124 R125 R126 R127 R128 R129 R130 R131 R132 R133 R134 R135 R136 R137 R138 R139 R140 R141 R142 R143 R144 R145 R146 R147 R148 R149 R150 R151 R152 R153 R154 R156 R157 R158 R160 R161 R162 R163 R164 R165 R166 R167 R168 R169 R170 R171 R172 R173 R174 R175 R176 R179 R181 R182 R184 R187 R188 R189 R190 R191 R192 R193 R194 R195 R197 R198 R199 R200 R201 R202 R203 R204 R205 R206 R207 R208 R209: library part Res2, "Resistor"
T1: library part "Header 6X2", "Header, 6-Pin, Dual row"
TVS2 TVS3: library part CAN_TVS_NUP2015L
U1 U5: library part ADUM1281ARZ-RL7
U2 U6: library part SIT1050T
U3: library part LM2576HVR-5.0
U4: library part LM2672M-ADJ/NOPB
U14: library part SN65HVD11DR
U27: library part AM26LV32CDR
U29 U31: library part SY6345AAC
U34: library part "Header 4X2A", "Header, 4-Pin, Dual row"

## Free pads (board coordinates)
  round 237.74 hole 165: 0(50202,49802) 1(54532,49801) 2(58859,46261) 2(58859,49799) 4(54531,46261) 5(50201,46261)

## Via types
v1: diameter 19, hole 11.81, Top Layer to Bottom Layer, 133 vias
v2: diameter 19, hole 12, Top Layer to Bottom Layer, 130 vias
v3: diameter 20, hole 10, Top Layer to Bottom Layer, 67 vias
v4: diameter 24, hole 12, Top Layer to Bottom Layer, 29 vias
v5: diameter 40, hole 20, Top Layer to Bottom Layer, 1 vias

## Nets (pads, with @x,y where several pads share a name; then routed paths per layer and width w, separated by ;. In a path a pad name is that pad's centre, name@x,y a point inside that pad or via, vN(x,y) a via of type N, cw(c..) or ccw(c..) an arc to the next point about the centre after c; other vN are vias at no path point)
3V3: C1.1 C2.2 C5.1 C7.2 C8.2 C15.1 C25.2 C35.1 C37.2 C48.2 C60.1 C66.1 C67.1 C69.1 C75.2 C80.2 C81.2 C85.2 C86.2 C88.1 L10.1 P31.1 R28.2 R30.1 R33.1 R34.2 R37.2 R40.2 R41.1 R45.2 R46.2 R49.2 R71.2 R74.2 R76.2 R86.2 R88.2 R92.2 R99.2 R102.2 R104.2 R106.2 R107.2 R108.2 R109.2 R111.2 R112.2 R115.1 R119.1 R122.1 R123.1 R126.2 R128.2 R130.1 R131.1 R133.2 R136.2 R139.1 R149.1 R150.1 R153.1 R156.2 R162.2 R169.1 R175.1 R182.2 R189.1 R190.1 R191.1 R192.1 R197.2 R198.2 R200.2 R203.1 R207.1 TP4.1 U1.1 U1.5 U2.1 U5.1 U5.5 U6.1 U7.2 U7.4 U14.4 U19.1 U27.4 U27.16 U33.6 U33.11 U33.19 U33.28 U33.50 U33.75 U33.100 U34.8 X1.1 X1.4 | length 35913.9
  Top Layer w9.94: R136.2@54909,46927 R133.2@54909,47015 ; R133.2@54914,47021 54947,47054 55018,47054 R131.1@55045,47027
  Top Layer w10: v1@51462,48704 51517,48704 R37.2@51519,48706 ; R28.2@51580,48494 R34.2@51580,48564 ; C81.2@53852,48160 53890,48160 53939.81,48110.19 U33.11@54047.17,48110.19 ; C80.2@53908,47908 53953.45,47953.45 U33.19@54046.46,47953.45 ; U33.6@54047.61,48208.16 54092.16,48208.16 54110.28,48226.28 U33.100@54110.28,48368.35 54110.28,48433.72 C69.1@54080,48464 C66.1@54080,48534 ; U33.28@54146.99,47775.5 54146.99,47665.01 C86.2@54170,47642 ; U33.50@54581.92,47772.26 54581.92,47694.08 C85.2@54606,47670 ; U33.75@54642.73,48308.24 54696.24,48308.24 54766,48378 C67.1@54776,48378 ; 57941,49304 57945,49308 58040,49308 58065.57,49333.57 U27.4@58122,49333.57
  Top Layer w10.94: X1.1@53607.3,48030 X1.1@53608,48030.69 ; R126.2@53949,46716 53949,46726 53981,46758 54054,46758 R122.1@54081,46731 ; v1@55008,47016 R131.1@55038,47016 ; R104.2@55855,46869 55855,46956 55881,46982 55969,46982 R99.2@55994,46957 ; R198.2@55965,48476 55992,48503 56078,48503 R197.2@56098,48483 ; v2(56806,48141) R203.1@56806,48169 ; R169.1@58279,47133 v2@58300,47133
  Top Layer w11.94: R130.1@53796,46722 R126.2@53941,46722 ; R128.2@53949,46636 R126.2@53949,46716 ; R76.2@55146,47712 55146,47831 ; C88.1@55618,48234 C88.1@55618,48238
  Top Layer w12: U5.1@56058,48878 56066,48870 C37.2@56066,48726 ; C35.1@57626,49156 57626,49256 U14.4@57654,49284 ; U27.4@58140,49334 58188,49334 ; 58190,49334 58206,49334 58226,49354 58226,49448 58262,49484 U27.16@58329,49484 58390,49484 58413,49507 C60.1@58447,49507 ; R153.1@58514,49232 R149.1@58514,49354 ; R149.1@58528,49356 v3@58576,49356
  Top Layer w12.36: R33.1@51589,47528 51592,47531 v2(51670,47531)
  Top Layer w12.94: R49.2@50784,48267 50784,48364 50818,48398 50885,48398 R40.2@50924,48359 ; R112.2@51723,47966 R111.2@51723,48064 ; R108.2@51726,48266 51726,48360 51762,48396 51832,48396 R106.2@51874,48354 ; R111.2@51728,48064 51728,48069 51757,48098 51843,48098 R109.2@51870,48071
  Top Layer w13.94: R139.1@54749,47014 R133.2@54899,47014 ; R207.1@58321,46895 v1(58346,46895)
  Top Layer w14.36: U6.1@52654,47192 52664,47202 C15.1@52814,47202 ; R115.1@52788,48039 v2(52820,48039) ; C15.1@52805,47212 v2@52805,47362 ; C15.1@52814,47200 52842,47200 52874,47168 52874,46818 52896,46796 53722,46796 R130.1@53796,46722
  Top Layer w14.94: R123.1@53797,47015 53819,47015
  Top Layer w15: 55360,47928 55458,47928 ; 55674,48030 55642,47998 55486,47998 55458,47970 55458,47928 ; v1@55855,47928 55458,47928 ; R150.1@56652,47243 v2@56823,47243 ; R88.2@56828,47744 56883,47799 v2@57646,47799 ; R86.2@56970,47746 56970,47796 ; v2@57632,47499 58209,47499 58270,47438 v2@58303,47438
  Top Layer w16.94: R41.1@51580,47772 v2@51667,47772
  Top Layer w20: R46.2@51264,48900.5 v4(51264,48948) ; R30.1@51588,48064 R111.2@51723,48064 ; R34.2@51593,48558 v1@51648,48558 ; U2.1@51662,47192 51672,47202 C1.1@51830,47202 ; R119.1@52772.68,47881 52773.68,47882 v2(52819,47882) ; C25.2@53067.37,48927.37 C7.2@53067.37,49084 ; C5.1@53490,48030 X1.1@53607.3,48030 ; C5.1@53490,48031.5 v4(53490,47984) 53490,47962 53510,47942 53578,47942 R182.2@53580,47944 ; X1.1@53608,48030.69 X1.4@53608,48117.31 ; v4(53790,48156) C81.2@53837.5,48156 ; 53793,48579 53960,48746 54374,48746 54414,48706 C2.2@54744,48706 ; C80.2@53890,47900 53876,47900 v3(53820,47844) 53708,47732 53708,47602 53756,47554 C75.2@53906,47554 53906,47512 53934,47484 54096,47484 54166,47554 54166,47600 C86.2@54166,47638 ; v4(54614,47602) C85.2@54614,47649.5 ; U1.1@54744,48870 U1.1@54738,48876 54616,48998 54616,49504 54680,49568 R192.1@54842,49568 54842,49752 54858,49768 P31.1@54858,49900 ; C67.1@54776,48378 55288,48378 55462,48204 U34.8@55494,48204 ; v1@55010,47837 55251,47837 R71.2@55285,47803 ; R71.2@55285,47809 55285,47811 55339,47865 R191.1@55339,47928 ; U34.8@55521,48203 55573,48203 55618,48248 55618,48306 55788,48476 R198.2@55965,48476 ; C88.1@55618,48234 55672,48180 R190.1@55672,48160 ; 55674,48030 R190.1@55674,48156 ; R200.2@55963,48377 55964,48378 R198.2@55964,48470 ; R92.2@56828,47651 R88.2@56828,47744 ; C48.2@57460,48502 57440,48522 U19.1@57440,48626 57440,48688 57714,48962 57714,49118 57676,49156 C35.1@57626,49156 ; U14.4@57654,49284 57734,49284 57750,49268 R156.2@57941,49268 ; R156.2@57941,49270 R162.2@57941,49338
  Top Layer w25: U7.4@53278,48920 53452,48920 53908,48464 C69.1@54070,48464 ; C2.2@54744,48706 U1.1@54744,48870
  Top Layer w30: C25.2@53066,48918 53251,48918 U7.4@53269,48936 ; U7.4@53252,48919 U7.2@53252,49155 ; C75.2@53906,47554 53911,47559 L10.1@53911,47627
  Bottom Layer w10.94: 56436,47830 56747,48141 v2(56806,48141)
  Bottom Layer w11.36: v1@53831,46719 v2@53831,47013
  Bottom Layer w12.36: v1@58346,46894 v1@58346,46896
  Bottom Layer w14.36: v2(52819,47882) 52784,47917 52784,48003 v2(52820,48039)
  Bottom Layer w15: v2@51669,47530 v1@51669,48062 ; v1(55856,47929) 56333,47929 56574,47688 v1(56829,47688) ; v2@58303,47438 58303,46939 v1@58346,46896
  Bottom Layer w16: v1(51668,48064) 51725,48121
  Bottom Layer w20: v1(50886,48398) 51076,48208 51378,48208 51404,48234 51404,48404 51558,48558 51732,48558 51748,48542 51748,48325 51725,48302 51725,48121 ; 51264,48704 v1(51464,48704) ; v4(51264,48948) 51264,48584 51424,48424 ; v2(51670,47531) 51670,47200 U2.1@51662,47192 51728,47192 51874,47338 52777,47338 52805,47366 52805,47868 v2(52819,47882) 52902,47882 53569,48549 TP4.1@53569,48805 ; 53663,48001 53663,48007 ; v4(54164,47586) 54598,47586 v4(54614,47602) 54760,47602 54826,47668 54826,47784 54879,47837 v1(55006,47837) 55006,47342 ; U1.1@54738,48876 54810,48948 55066,48948 U1.5@55138,48876 55138,48882 55208,48952 55490,48952 55564,48878 U5.1@56058,48878 56058,48884 56116,48942 56408,48942 56458,48892 U5.5@56458,48878 56458,48906 56544,48992 57182,48992 57402,49212 57592,49212 57654,49274 U14.4@57654,49284 ; v1@55006,47018 55006,47342 ; v2@55854,46905 55854,47006 55698,47162 55698,47310 55666,47342 55006,47342 ; v2@56829,47249 v1(56829,47688) ; v2(57630,47499) 57630,47780 v2(57647,47797) ; v3(58390,49486) 58390,49428 58460,49358 58572,49358 v3(58574,49356)
  Bottom Layer w25: v4(53490,47984) 53640,47984 53790,48134 53790,48266 v3(53988,48464) ; 53663,48001 v3(53820,47844)
  other v1: 53830,46722 55007,47017 55007,47448 51668,47897 51646,48558
  other v2: 55854,46902 53830,47015 58302,47135 56829,47243 52806,47366 58304,47440 57992,47500 51668,47772 51725,48308